# Altium PCB PCB1.PcbDoc (part 2 of 2)
Units mm, origin at the board's own origin, x right, y up, seen from the top; angles counter-clockwise.
Board outline 100 x 50 mm, 2 copper layers (Top Layer, Bottom Layer); 173 components, 108 nets, 510 pads, 764 vias.
Unrouted connection lines stored in the file: 12.
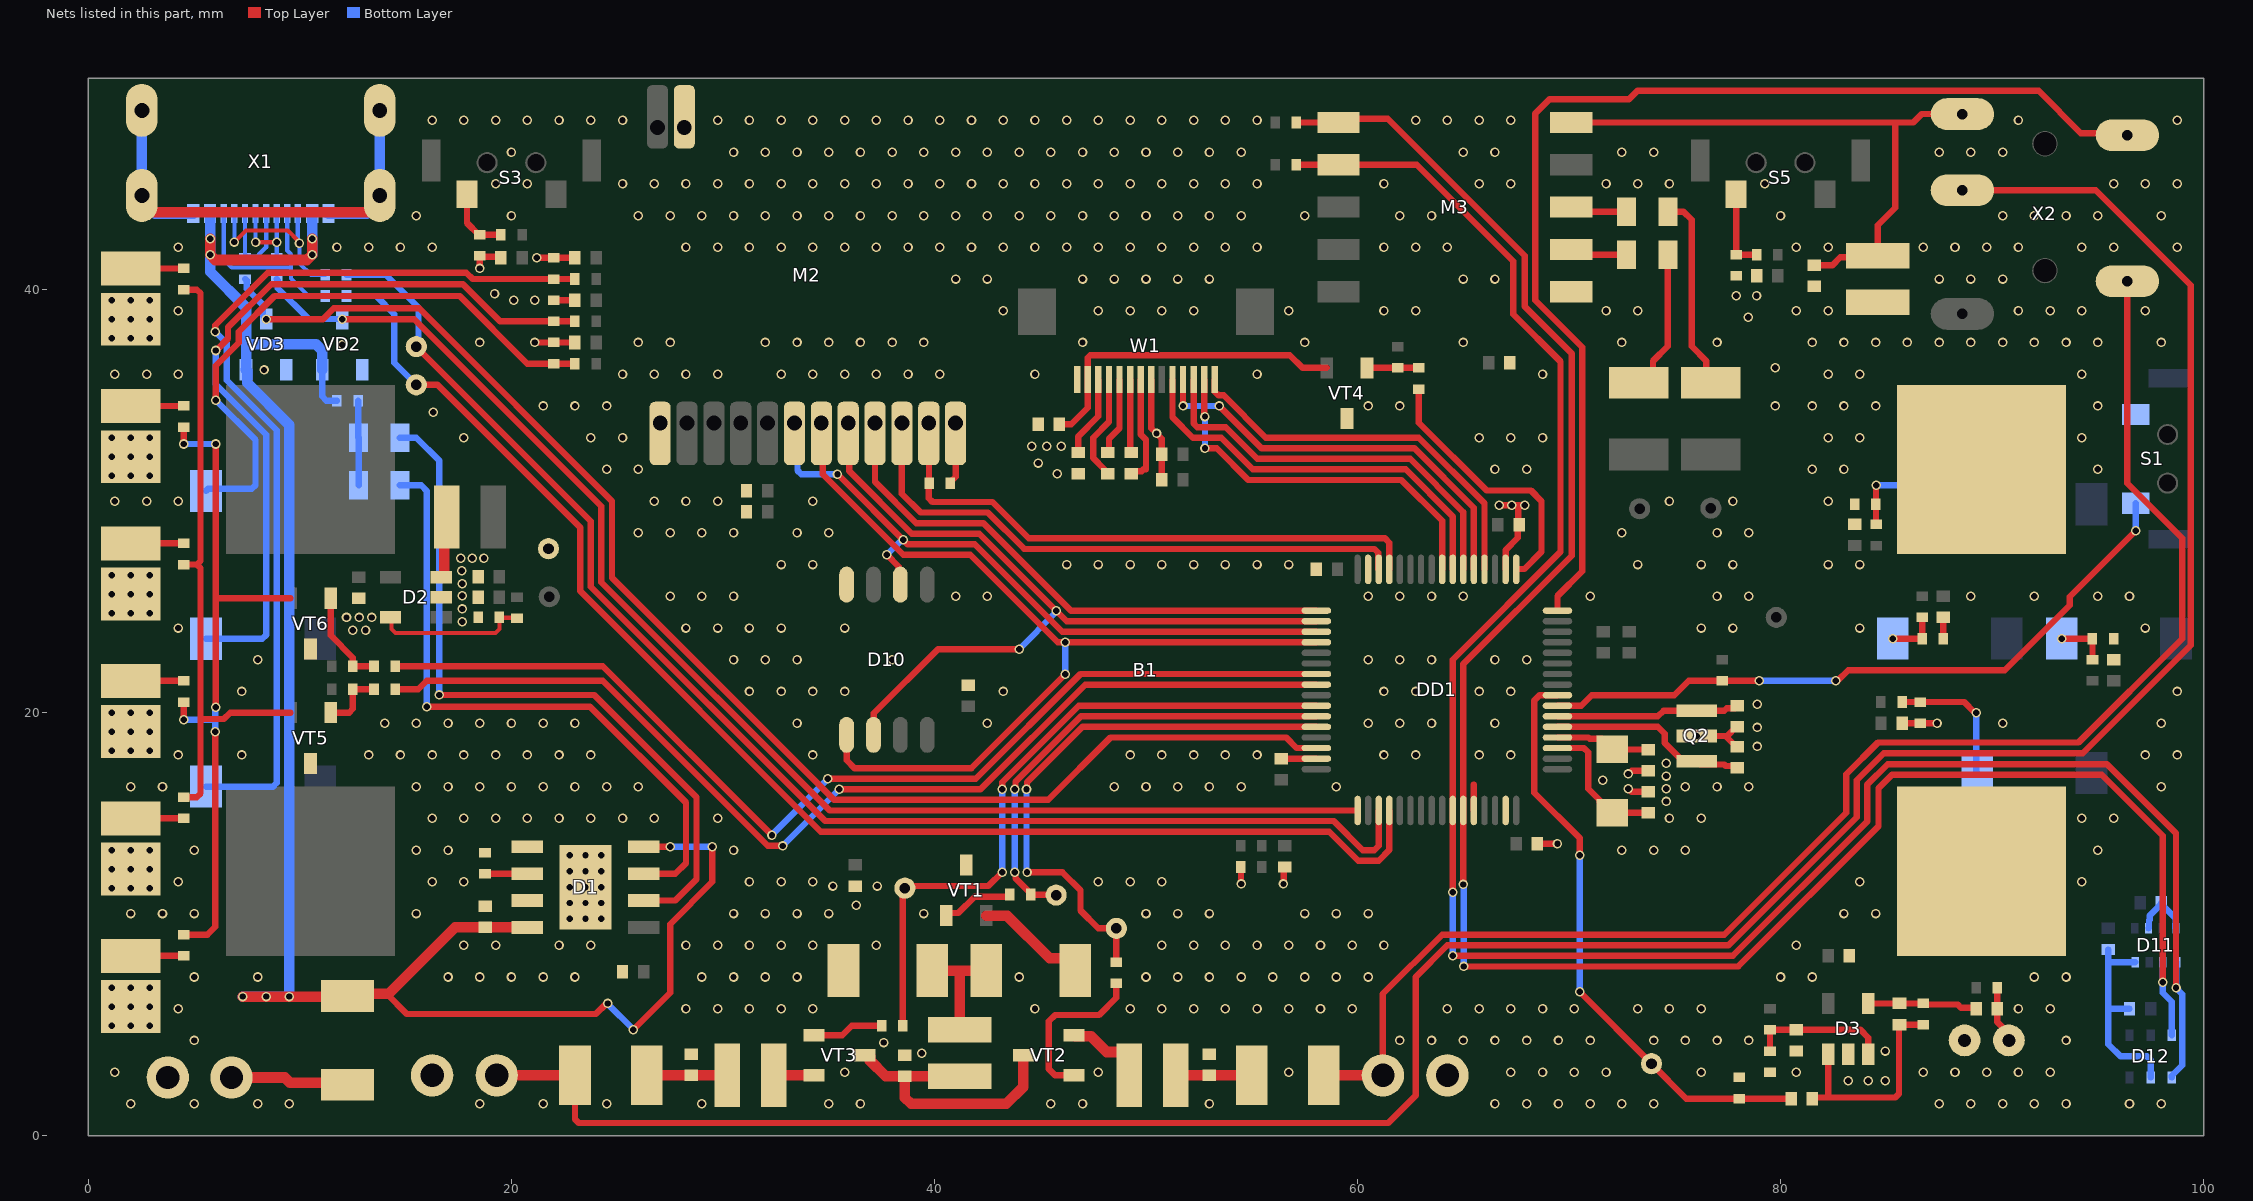
[diagram p2: the nets of this part, all layers, seen from the top]

## Via types
v1: diameter 0.45, hole 0.3, Top Layer to Bottom Layer, tented both sides, 764 vias

## Nets (pads, with @x,y where several pads share a name; then routed paths per layer and width w, separated by ;. In a path a pad name is that pad's centre, name@x,y a point inside that pad or via, vN(x,y) a via of type N, cw(c..) or ccw(c..) an arc to the next point about the centre after c; other vN are vias at no path point) (continued)
GND: B1.2 B1.4 C1.2 C2.2 C3.2 C4.2 C5.2 C6.2 C7.2 C8.2 C12.1 C13.2 C14.2 C16.2 C18.2 C19.2 C21.1 C22.2 C23.2 C24.2 C25.1 C26.2 C27.2 C28.2 C29.2 C30.2 C33.2 C34.2 C35.2 C36.2 C37.2 C38.2 C39.2 C40.2 C41.2 C42.2 C43.2 C44.1 C48.2 C49.2 C50.2 C51.2 C52.2 D1.1 D1.3 D1.9 D2.2 D3.2 D4.1 D5.1 D6.1 D7.1 D8.1 D9.1 D10.4 D11.1 D11.5 D11.7 D12.5 DD1.18 DD1.31 DD1.47 DD1.60 DD1.63 L7.2 M1.2 M2.1 M2.12 M2.14 M3.6 P2.1 P12.1 P13.1 P17.1 Q2.2 R15.2 R16.2 R18.2 R19.2 R22.2 R23.2 R26.2 R27.2 R29.2 R31.2 R33.2 R35.2 R37.2 R40.2 R42.2 S1.1 VD2.1 VD3.1 VD5.1 W1.LED_C W1.VSS X1.1 | length 70.5
  Top Layer w0.3: v1(18.5,41) R23.2@18.5,41.6 18.55,41.55 19.45,41.55 C36.2@19.5,41.5 ; v1(21.1,37.5) R37.2@22,37.5 C43.2@23,37.5 ; v1(21.2,41.5) R33.2@22,41.5 C41.2@23,41.5 ; R35.2@22,39.5 C42.2@23,39.5 ; R19.2@40.75,30.853 40.75,30.903 41,31.153 M2.1@41,33.7 ; W1.VSS@50.25,35.75 50.25,33.45 v1(50.5,33.2) 50.75,32.95 C18.2@50.75,32.226 C19.2@50.75,31 ; R16.2@54.49,12.679 54.49,11.91 v1(54.5,11.9) ; C6.2@56.388,17.824 DD1.47@58.054,17.824 ; v1(56.5,11.9) 56.51,11.91 56.51,12.641 C25.1@56.569,12.7 ; DD1.60@65.504,15.374 65.504,16.604 ; v1(66.7,29.8) v1(67.3,29.8) 67.606,29.8 ; DD1.18@67.004,26.774 67.004,27.686 67.58,28.262 67.58,28.828 C7.2@67.64,28.888 67.606,28.922 67.606,29.8 ; v1(67.9,29.8) 67.606,29.8 ; C8.2@68.504,13.8 v1(69.454,13.8) ; v1(72.8,16.4) 72.814,16.4 72.956,16.258 C2.2@73.742,16.258 ; v1(72.8,17.1) 72.814,17.1 72.964,17.25 C1.2@73.75,17.25 ; v1(76.041,18.895) 77.473,18.895 ; C3.2@77.953,18.386 77.903,18.386 77.473,18.815 77.473,18.895 ; C4.2@77.953,19.324 77.903,19.324 77.473,18.895 ; C40.2@85.75,19.5 R31.2@86.604,19.5 v1(87.4,19.5) ; R26.2@87.7,23.5 C37.2@87.7,24.5
  Top Layer w0.5: X1.1@2.525,44.45 2.525,44.221 3.087,43.659 13.213,43.659 13.775,44.221 X1.1@13.775,44.45 ; C23.2@18.75,10.845 C23.2@18.8,10.845
  Bottom Layer w0.3: C50.2@95.5,8.8 95.5,8.175 ; C52.2@96.5,6 95.5,6 ; D11.1@96.775,8.2 95.525,8.2 95.5,8.175 ; D11.7@97.4,9.8 97.425,9.825 97.425,10.176 97.458,10.209 97.458,10.408 C51.2@98,10.95 ; D12.5@97.5,2.75 97.5,3.574 97.324,3.75 96.075,3.75 95.5,4.325 95.5,6 ; C51.2@98,11 C51.2@98,10.95 ; D11.5@98.7,9.8 98.675,9.825 98.675,10.275 C51.2@98,10.95 ; 95.5,6 95.5,8.175
  Bottom Layer w0.5: X1.1@2.525,48.475 2.525,44.221 3.146,43.6 X1.1@4.95,43.6 ; X1.1@11.35,43.6 13.154,43.6 13.775,44.221 X1.1@13.775,44.335 ; X1.1@13.775,44.45 X1.1@13.775,48.475
  other v1: 2,1.5 5,1.5 8,1.5 9.5,1.5 18.5,1.5 21.5,1.5 24.5,1.5 29,1.5 35,1.5 36.5,1.5 45.5,1.5 47,1.5 53,1.5 66.5,1.5 68,1.5 69.5,1.5 71,1.5 72.5,1.5 74,1.5 87.5,1.5 89,1.5 90.5,1.5 92,1.5 93.5,1.5 96.5,1.5 98,1.5 83.2,2.6 84.15,2.6 84.95,2.6 1.25,3 35.75,3 47.75,3 56.75,3 67.25,3 68.75,3 70.25,3 71.75,3 76.25,3 80.75,3 86.75,3 88.25,3 89.75,3 91.25,3 92.75,3 39.4,3.9 84.95,4 37.6,4.4 5,4.5 62,4.5 63.5,4.5 65,4.5 66.5,4.5 68,4.5 69.5,4.5 71,4.5 74,4.5 75.5,4.5 77,4.5 78.5,4.5 93.5,4.5 1.1,5.2 2,5.2 2.9,5.2 4.25,6 28.25,6 29.75,6 31.25,6 32.75,6 34.25,6 44.75,6 49.25,6 50.75,6 52.25,6 53.75,6 55.25,6 56.75,6 58.25,6 59.75,6 64.25,6 65.75,6 67.25,6 68.75,6 70.25,6 73.25,6 74.75,6 76.25,6 91.25,6 92.75,6 1.1,6.1 2,6.1 2.9,6.1 1.1,7 2,7 2.9,7 5,7.5 8,7.5 17,7.5 18.5,7.5 20,7.5 21.5,7.5 23,7.5 29,7.5 30.5,7.5 32,7.5 33.5,7.5 44,7.5 50,7.5 51.5,7.5 53,7.5 54.5,7.5 56,7.5 57.5,7.5 59,7.5 60.5,7.5 80,7.5 81.5,7.5 92,7.5 93.5,7.5 17.75,9 19.25,9 22.25,9 23.75,9 28.25,9 29.75,9 31.25,9 32.75,9 34.25,9 37.25,9 50.75,9 52.25,9 53.75,9 55.25,9 56.75,9 58.25,9 59.75,9 61.25,9 80.75,9 2,10.5 3.5,10.5 5,10.5 15.5,10.5 30.5,10.5 32,10.5 33.5,10.5 35,10.5 39.5,10.5 50,10.5 51.5,10.5 53,10.5 57.5,10.5 59,10.5 60.5,10.5 83,10.5 84.5,10.5 36.3,10.9 1.1,11.7 2,11.7 2.9,11.7 35.2,11.8 37.3,11.8 4.25,12 16.25,12 17.75,12 31.25,12 32.75,12 34.25,12 47.75,12 49.25,12 50.75,12 83.75,12 94.25,12 1.1,12.6 2,12.6 2.9,12.6 1.1,13.5 2,13.5 2.9,13.5 5,13.5 15.5,13.5 17,13.5 30.5,13.5 72.5,13.5 74,13.5 75.5,13.5 95,13.5 16.25,15 17.75,15 19.25,15 20.75,15 22.25,15 23.75,15 25.25,15 26.75,15 29.75,15 74.75,15 76.25,15 94.25,15 95.75,15 74.6,15.8 74.6,16.4 2,16.5 3.5,16.5 15.5,16.5 17,16.5 18.5,16.5 20,16.5 21.5,16.5 23,16.5 24.5,16.5 26,16.5 48.5,16.5 50,16.5 51.5,16.5 53,16.5 54.5,16.5 59,16.5 75.5,16.5 77,16.5 78.5,16.5 98,16.5 71.6,16.8 74.6,17 74.6,17.6 4.25,18 7.25,18 13.25,18 14.75,18 16.25,18 17.75,18 19.25,18 20.75,18 22.25,18 23.75,18 34.25,18 49.25,18 50.75,18 52.25,18 53.75,18 55.25,18 61.25,18 62.75,18 65.75,18 67.25,18 97.25,18 98.75,18 1.1,18.2 2,18.2 2.9,18.2 78.9,18.4 1.1,19.1 2,19.1 2.9,19.1 78.9,19.3 14,19.5 15.5,19.5 17,19.5 18.5,19.5 20,19.5 21.5,19.5 23,19.5 33.5,19.5 42.5,19.5 60.5,19.5 62,19.5 63.5,19.5 66.5,19.5 90.5,19.5 98,19.5 1.1,20 2,20 2.9,20 78.9,20.4 7.25,21 31.25,21 32.75,21 34.25,21 35.75,21 43.25,21 61.25,21 62.75,21 65.75,21 67.25,21 98.75,21 8,22.5 30.5,22.5 32,22.5 33.5,22.5 38,22.5 60.5,22.5 62,22.5 63.5,22.5 66.5,22.5 68,22.5 12.5,23.9 13.1,23.9 4.25,24 28.25,24 29.75,24 31.25,24 32.75,24 35.75,24 76.25,24 77.75,24 83.75,24 97.25,24 17.675,24.3 12.2,24.5 12.8,24.5 13.4,24.5 1.1,24.7 2,24.7 2.9,24.7 17.675,24.9 27.5,25.5 29,25.5 30.5,25.5 41,25.5 42.5,25.5 60.5,25.5 62,25.5 63.5,25.5 65,25.5 71,25.5 77,25.5 78.5,25.5 89,25.5 92,25.5 95,25.5 96.5,25.5 17.675,25.525 1.1,25.6 2,25.6 2.9,25.6 17.675,26.1 1.1,26.5 2,26.5 2.9,26.5 17.65,26.7 32.75,27 34.25,27 46.25,27 47.75,27 49.25,27 50.75,27 52.25,27 53.75,27 55.25,27 56.75,27 73.25,27 76.25,27 77.75,27 82.25,27 83.75,27 17.6,27.3 18.15,27.3 18.7,27.3 26,28.5 27.5,28.5 29,28.5 30.5,28.5 33.5,28.5 35,28.5 72.5,28.5 77,28.5 78.5,28.5 1.25,30 2.75,30 4.25,30 26.75,30 28.25,30 29.75,30 34.25,30 74.75,30 77.75,30 82.25,30 1.1,31.2 2,31.2 2.9,31.2 45.8,31.3 24.5,31.5 26,31.5 66.5,31.5 68,31.5 81.5,31.5 83,31.5 95,31.5 44.9,31.8 1.1,32.1 2,32.1 2.9,32.1 44.6,32.6 45.3,32.6 46,32.6 1.1,33 2,33 2.9,33 17.75,33 23.75,33 25.25,33 65.75,33 67.25,33 68.75,33 82.25,33 83.75,33 94.25,33 16.3,34.2 21.5,34.5 23,34.5 24.5,34.5 60.5,34.5 62,34.5 79.75,34.5 81.5,34.5 83,34.5 84.5,34.5 95,34.5 1.25,36 2.75,36 4.25,36 25.25,36 26.75,36 28.25,36 29.75,36 32.75,36 34.25,36 35.75,36 37.25,36 38.75,36 40.25,36 44.75,36 55.25,36 68.75,36 82.25,36 83.75,36 94.25,36 8.3,36.2 79.75,36.3 12,37.4 18.5,37.5 26,37.5 27.5,37.5 32,37.5 33.5,37.5 35,37.5 36.5,37.5 38,37.5 39.5,37.5 47,37.5 57.5,37.5 65,37.5 72.5,37.5 77,37.5 81.5,37.5 83,37.5 84.5,37.5 86,37.5 87.5,37.5 89,37.5 90.5,37.5 92,37.5 93.5,37.5 95,37.5 98,37.5 1.1,37.7 2,37.7 2.9,37.7 1.1,38.6 2,38.6 2.9,38.6 78.468,38.7 4.25,39 43.25,39 47.75,39 49.25,39 50.75,39 52.25,39 56.75,39 61.25,39 62.75,39 71.75,39 73.25,39 80.75,39 82.25,39 91.25,39 92.75,39 94.25,39 97.25,39 1.1,39.5 2,39.5 2.9,39.5 20.1,39.5 21.1,39.5 77.9,39.706 78.868,39.706 19.2,39.8 41,40.5 42.5,40.5 47,40.5 48.5,40.5 50,40.5 51.5,40.5 53,40.5 65,40.5 66.5,40.5 87.5,40.5 89,40.5 90.5,40.5 4.25,42 11.75,42 13.25,42 14.75,42 16.25,42 28.25,42 29.75,42 31.25,42 32.75,42 34.25,42 35.75,42 37.25,42 38.75,42 40.25,42 41.75,42 43.25,42 44.75,42 46.25,42 47.75,42 49.25,42 50.75,42 52.25,42 53.75,42 55.25,42 61.25,42 62.75,42 64.25,42 80.75,42 82.25,42 86.75,42 88.25,42 89.75,42 91.25,42 94.25,42 95.75,42 98.75,42 15.5,43.5 20,43.5 26,43.5 27.5,43.5 29,43.5 30.5,43.5 32,43.5 33.5,43.5 35,43.5 36.5,43.5 38,43.5 39.5,43.5 41,43.5 42.5,43.5 44,43.5 45.5,43.5 47,43.5 48.5,43.5 50,43.5 51.5,43.5 53,43.5 54.5,43.5 57.5,43.5 62,43.5 63.5,43.5 80,43.5 90.5,43.5 92,43.5 93.5,43.5 95,43.5 98,43.5 19.25,45 20.75,45 25.25,45 26.75,45 28.25,45 29.75,45 31.25,45 32.75,45 34.25,45 35.75,45 37.25,45 38.75,45 40.25,45 41.75,45 43.25,45 44.75,45 46.25,45 47.75,45 49.25,45 50.75,45 52.25,45 53.75,45 55.25,45 61.25,45 65.75,45 67.25,45 71.75,45 73.25,45 74.75,45 79.25,45 95.75,45 97.25,45 98.75,45 20,46.5 30.5,46.5 32,46.5 33.5,46.5 35,46.5 36.5,46.5 38,46.5 39.5,46.5 41,46.5 42.5,46.5 44,46.5 45.5,46.5 47,46.5 48.5,46.5 50,46.5 51.5,46.5 53,46.5 54.5,46.5 65,46.5 66.5,46.5 72.5,46.5 74,46.5 87.5,46.5 89,46.5 90.5,46.5 16.25,48 17.75,48 19.25,48 20.75,48 22.25,48 23.75,48 25.25,48 29.75,48 31.25,48 32.75,48 34.25,48 35.75,48 37.25,48 38.75,48 40.25,48 41.75,48 43.25,48 44.75,48 46.25,48 47.75,48 49.25,48 50.75,48 52.25,48 53.75,48 55.25,48 62.75,48 64.25,48 65.75,48 67.25,48 91.25,48 98.75,48
HEADPHONE_PR: DD1.16 X2.2 | length 54.2
  Top Layer w0.3: DD1.16@69.454,24.824 69.454,25.512 70.624,26.682 70.624,37.276 68.4,39.5 68.4,48.324 69.076,49 72.836,49 73.236,49.4 92.201,49.4 94.201,47.4 96.3,47.4 X2.2@96.4,47.3
lcd_cd: DD1.22 W1.CD | length 19.3
  Top Layer w0.3: W1.CD@52.25,35.75 52.25,33.668 52.426,33.492 53.763,33.492 55.255,32 62.486,32 65.004,29.482 DD1.22@65.004,26.774
LCD_PWM: DD1.17 R12.1 | length 12.9
  Top Layer w0.3: R12.1@62.9,35.3 62.9,33.707 66.107,30.5 68.2,30.5 68.7,30 68.7,27.6 67.887,26.787 67.517,26.787 DD1.17@67.504,26.774
lcd_rst: DD1.24 W1.RST | length 18.2
  Top Layer w0.3: W1.RST@52.75,35.75 52.75,34.051 52.788,34.014 v1(52.788,34) ; v1(52.788,32.492) 53.349,32.492 54.841,31 62.072,31 64.004,29.068 DD1.24@64.004,26.774
  Bottom Layer w0.3: v1(52.788,32.492) v1(52.788,34)
LED_COLD: DD1.40 R45.1 | length 50.1
  Top Layer w0.3: R45.1@14.5,21.1 15.6,21.1 16,21.5 24.315,21.5 32.108,13.707 32.815,13.707 v1(32.825,13.697) ; v1(35.5,16.374) 42.174,16.374 47.124,21.324 DD1.40@58.054,21.324
  Bottom Layer w0.3: v1@32.825,13.698 v1(35.5,16.374)
LED_WARM: DD1.39 R50.1 | length 50
  Top Layer w0.3: R50.1@14.5,22.2 24.322,22.2 v1(32.316,14.207) ; v1(34.956,16.873) v1(34.956,16.873) 41.953,16.874 46.903,21.824 DD1.39@58.054,21.824
  Bottom Layer w0.3: v1(32.316,14.207) 32.316,14.219 34.956,16.86 v1(34.956,16.873)
MIC: C47.2 DD1.8 P6.1 R40.1 | length 28
  Top Layer w0.3: DD1.8@69.454,20.824 68.604,20.824 68.354,20.574 68.354,16.219 70.5,14.073 v1(70.5,13.25) ; v1(70.5,6.8) P6.1@73.9,3.4 75.55,1.75 R40.1@78.05,1.75 C47.2@80.5,1.75
  Bottom Layer w0.3: v1(70.5,6.8) v1(70.5,13.25)
NetC1_1: C1.1 DD1.4 Q1.1 | length 4.5
  Top Layer w0.3: DD1.4@69.454,18.824 70.004,18.824 70.916,18.824 70.982,18.758 71.55,18.758 Q1.1@72.05,18.258 73.742,18.258 C1.1@73.75,18.25
NetC2_1: C2.1 DD1.3 Q1.2 | length 6.6
  Top Layer w0.3: DD1.3@69.454,18.324 70.004,18.324 70.709,18.324 70.904,18.129 70.904,16.404 71.45,15.858 71.45,15.758 71.95,15.258 C2.1@73.742,15.258
NetC3_1: C3.1 DD1.5 Q2.1 | length 9.3
  Top Layer w0.3: DD1.5@69.454,19.324 74.2,19.324 74.524,19 74.524,18.562 75.391,17.695 Q2.1@76.041,17.695 ; Q2.1@76.191,17.545 77.341,17.545 77.413,17.473 77.866,17.473 C3.1@77.953,17.386
NetC4_1: C4.1 DD1.6 Q2.3 | length 8.7
  Top Layer w0.3: DD1.6@69.454,19.824 74.2,19.824 74.471,20.095 77.341,20.095 77.45,20.204 77.833,20.204 C4.1@77.953,20.324
NetC11_1: C11.1 C14.1 L2.2 | length 3.6
  Top Layer w0.5: L2.2@51.4,2.85 C14.1@53,2.85 C11.1@55,2.85
NetC13_1: C13.1 L1.2 VT2.2 VT3.2 | length 13.6
  Top Layer w0.5: 36.7,3.8 36.9,3.8 36.95,3.75 36.95,3.55 37.7,2.8 C13.1@38.6,2.8 ; L1.2@41.2,2.8 C13.1@38.6,2.8 ; 44.2,3.8 44.2,2.3 43.4,1.5 38.893,1.5 38.6,1.793 C13.1@38.6,2.8
NetC15_1: C15.1 C16.1 L3.2 | length 3.8
  Top Layer w0.5: C15.1@26.4,2.85 C16.1@28.5,2.85 L3.2@30.2,2.85
NetC17_1: C17.1 W1.VB1- | length 3.5
  Top Layer w0.3: W1.VB1-@49.25,35.75 49.25,32.35 C17.1@49.3,32.3
NetC17_2: C17.2 W1.VB1+ | length 5.1
  Top Layer w0.3: C17.2@49.3,31.3 49.42,31.42 49.799,31.42 49.879,31.5 49.999,31.5 49.999,32.901 49.75,33.15 W1.VB1+@49.75,35.75
NetC20_1: C20.1 W1.VB0+ | length 5.1
  Top Layer w0.3: C20.1@48.2,31.3 48.08,31.42 48.03,31.42 48.03,31.509 47.5,32.039 47.5,33 48.25,33.75 W1.VB0+@48.25,35.75
NetC20_2: C20.2 W1.VB0- | length 3.7
  Top Layer w0.3: C20.2@48.2,32.3 48.25,32.35 48.25,32.95 48.75,33.45 W1.VB0-@48.75,35.75
NetC21_2: C21.2 W1.VLCD | length 3.8
  Top Layer w0.3: C21.2@46.8,32.3 46.8,33.058 47.75,34.008 W1.VLCD@47.75,35.75
NetC22_1: C22.1 VT4.3 W1.LED_A | length 15.6
  Top Layer w0.3: C22.1@45.9,33.641 46.47,33.641 47.25,34.421 W1.LED_A@47.25,35.75 47.25,36.783 47.367,36.9 56.8,36.9 57.4,36.3 58.55,36.3
NetC31_1: C31.1 L5.2 | length 9.4
  Top Layer w0.3: L5.2@74.676,43.688 75.412,43.688 75.8,43.3 75.8,37.318 76.494,36.624 76.494,35.806 C31.1@76.7,35.6
NetC32_1: C32.1 L6.2 | length 6.7
  Top Layer w0.3: C32.1@73.3,35.6 73.371,35.6 73.971,36.2 73.971,36.624 74.676,37.329 L6.2@74.676,41.656
NetC33_1: C33.1 L7.1 M3.10 X2.1 | length 28.5
  Top Layer w0.3: M3.10@70.1,47.9 85.425,47.9 ; C33.1@81.6,41.156 82.456,41.156 82.826,41.526 84.526,41.526 L7.1@84.6,41.6 84.6,43.05 85.425,43.875 85.425,47.9 ; X2.1@88.6,48.3 86.672,48.3 86.272,47.9 85.425,47.9
NetC45_1: C45.1 C46.2 D3.4 R39.1 | length 5.2
  Top Layer w0.3: D3.4@84.15,6.25 C45.1@85.6,6.25 ; C45.1@85.625,6.25 C45.1@85.6,6.25 ; C46.2@89.25,6 89.2,6.05 88.53,6.05 88.38,6.2 86.8,6.2 R39.1@86.75,6.25 C45.1@85.6,6.25
NetC45_2: C45.2 C47.1 D3.1 R39.2 | length 10.7
  Top Layer w0.3: C47.1@81.5,1.75 81.55,1.8 82.25,1.8 ; D3.1@82.25,3.85 82.25,1.8 ; R39.2@86.75,5.25 85.6,5.25 85.6,1.976 85.424,1.8 82.25,1.8
NetC46_1: C46.1 M1.1 R38.2 | length 2.7
  Top Layer w0.3: R38.2@90.25,7 C46.1@90.25,6 90.25,5.375 90.8,4.825 M1.1@90.8,4.5
NetC48_1: C48.1 D3.3 R41.2 R42.1 | length 6.6
  Top Layer w0.3: R42.1@79.5,4 R41.2@79.5,5 C48.1@80.75,5 83.78,5 84.15,4.63 D3.3@84.15,3.85
NetD1_2: D1.2 R15.1 | length 2
  Top Layer w0.3: R15.1@18.75,12.385 D1.2@20.75,12.385
NetD1_6: D1.6 VD6.2 | length 34.4
  Top Layer w0.3: v1(16.58,20.835) 23.915,20.835 28.75,16 28.75,12.115 27.75,11.115 D1.6@26.25,11.115
  Bottom Layer w0.3: VD6.2@14.725,33 15.5,33 16.58,31.92 v1(16.58,20.835)
NetD1_7: D1.7 VD7.2 | length 30.8
  Top Layer w0.3: v1(16,20.285) 23.715,20.285 28.25,15.75 28.25,12.885 27.75,12.385 D1.7@26.25,12.385
  Bottom Layer w0.3: VD7.2@14.725,30.75 15.73,30.75 16,30.48 v1(16,20.285)
NetD2_3: D2.3 L4.1 | length 3
  Top Layer w0.5: D2.3@16.68,26.406 16.762,26.406 16.812,26.456 16.812,29.118 L4.1@16.944,29.25
NetD2_5: D2.5 R17.2 R18.1 | length 7.2
  Top Layer w0.2: D2.5@14.28,24.506 14.33,24.456 14.33,23.95 14.52,23.76 19.24,23.76 19.43,23.95 R18.1@19.43,24.506 19.455,24.481 20.239,24.481 R17.2@20.264,24.456
NetD4_2: D4.2 R43.2 | length 2.5
  Top Layer w0.3: D4.2@2,41 R43.2@4.5,41
NetD5_2: D5.2 R44.2 | length 2.5
  Top Layer w0.3: D5.2@2,28 R44.2@4.5,28
NetD6_2: D6.2 R46.2 | length 2.5
  Top Layer w0.3: D6.2@2,15 R46.2@4.5,15
NetD7_2: D7.2 R49.2 | length 2.5
  Top Layer w0.3: D7.2@2,21.5 R49.2@4.5,21.5
NetD8_2: D8.2 R51.2 | length 2.5
  Top Layer w0.3: D8.2@2,34.5 R51.2@4.5,34.5
NetD9_2: D9.2 R52.2 | length 2.5
  Top Layer w0.3: D9.2@2,8.5 R52.2@4.5,8.5
NetDD1_7: DD1.7 R1.2 S1.2 | length 32.3
  Top Layer w0.3: DD1.7@69.454,20.324 70.574,20.324 71.074,20.824 74.981,20.824 75.657,21.5 R1.2@77.25,21.5 v1(79,21.5) ; v1(82.614,21.5) 82.696,21.5 83.196,22 90.6,22 93.671,25.071 93.671,25.471 v1(96.8,28.6)
  Bottom Layer w0.3: v1(79,21.5) v1(82.614,21.5) ; v1(96.8,28.6) S1.2@96.8,29.9
NetL1_1: L1.1 VD4.2 VD5.2 | length 5.4
  Top Layer w0.5: VD5.2@39.9,7.8 41.275,7.8 ; L1.1@41.2,5 41.2,7.725 41.275,7.8 ; VD4.2@42.45,7.8 41.275,7.8
NetL2_1: L2.1 VT2.3 | length 3.8
  Top Layer w0.5: 46.6,4.75 46.65,4.7 47.4,4.7 48.145,3.955 48.85,3.955 49.2,3.605 L2.1@49.2,2.85
NetL3_1: L3.1 VT3.3 | length 1.9
  Top Layer w0.5: L3.1@32.4,2.85 34.3,2.85
NetL5_1: L5.1 M3.8 | length 2.7
  Top Layer w0.3: M3.8@70.1,43.9 70.312,43.688 L5.1@72.726,43.688
NetL6_1: L6.1 M3.7 | length 2.7
  Top Layer w0.3: M3.7@70.1,41.9 70.344,41.656 L6.1@72.726,41.656
NetP1_1: P1.1 VD1.1 | length 5.6
  Top Layer w0.5: P1.1@6.763,2.75 9.277,2.75 9.527,2.5 12.15,2.5 VD1.1@12.25,2.4
NetR4_1: R4.1 X1.5 X1.7 | length 4.5
  Top Layer w0.2: v1(7.9,42.241) v1(8.9,42.241)
  Bottom Layer w0.2: v1(7.9,42.241) X1.7@7.9,43.6 ; R4.1@8.9,41.5 v1(8.9,42.241) X1.5@8.9,43.6
NetR5_1: R5.1 X1.6 X1.8 | length 5
  Bottom Layer w0.2: R5.1@7.4,41.5 7.576,41.5 7.4,41.676 X1.8@7.4,43.6 ; R5.1@7.576,41.569 7.969,41.569 8.1,41.7 8.4,42 X1.6@8.4,43.6
NetR6_1: R6.1 X1.3 X1.9 | length 8.8
  Top Layer w0.2: v1(6.9,42.25) 7.45,42.8 9.425,42.8 9.666,42.559 9.666,42.549 9.975,42.241 v1(9.975,42.2)
  Bottom Layer w0.2: v1(6.9,42.25) 6.9,43.5 X1.9@6.9,43.6 ; X1.3@9.9,43.6 9.9,43.5 9.9,42.316 9.975,42.241 9.975,41.242 10.517,40.7 R6.1@11.2,40.7
NetR7_1: R7.1 X1.4 X1.10 | length 10.6
  Bottom Layer w0.2: X1.10@6.4,43.6 6.4,41.425 6.775,41.05 9.575,41.05 ; X1.4@9.4,43.6 9.4,41.85 9.575,41.675 9.575,41.05 ; R7.1@11.2,39.7 10.4,39.7 9.575,40.525 9.575,41.05
NetR8_2: R8.2 VT1.1 | length 3.4
  Top Layer w0.3: VT1.1@40.55,10.4 40.674,10.524 41.124,10.524 41.9,11.3 43.475,11.3 43.55,11.375 R8.2@43.55,11.4
NetR9_2: R9.2 VT2.1 | length 7.9
  Top Layer w0.3: VT2.1@46.6,2.85 45.7,2.85 45.4,3.15 45.4,5.4 45.7,5.7 47.775,5.7 48.6,6.525 R9.2@48.6,7.2
NetR10_2: R10.2 VT3.1 | length 3.4
  Top Layer w0.3: VT3.1@34.3,4.75 35.637,4.75 36.087,5.2 R10.2@37.5,5.2
NetR11_1: R11.1 R12.2 VT4.1 | length 2.5
  Top Layer w0.3: VT4.1@60.45,36.3 R12.2@62.9,36.3
NetR13_2: R13.2 VD6.1 VD7.1 | length 4
  Bottom Layer w0.3: R13.2@12.75,34.75 12.75,33.025 VD6.1@12.775,33 VD7.1@12.775,30.75
NetR20_1: R20.1 R22.1 S2.2 | length 2.4
  Top Layer w0.3: v1(93.3,23.5) R22.1@94.75,23.5 R20.1@94.75,22.5
NetR21_1: R21.1 R23.1 S3.2 | length 3.2
  Top Layer w0.3: S3.2@17.9,44.5 17.9,43.15 18.45,42.6 R21.1@19.5,42.6
NetR24_1: R24.1 R26.1 S4.2 | length 2.4
  Top Layer w0.3: v1(85.3,23.5) R26.1@86.7,23.5 R24.1@86.7,24.5
NetR25_1: R25.1 R27.1 S5.2 | length 3.8
  Top Layer w0.3: S5.2@77.9,44.5 R27.1@77.9,41.656 R25.1@78.868,41.656
NetR28_1: R28.1 R29.1 S6.2 | length 7
  Top Layer w0.3: R28.1@84.53,28.9 84.515,28.915 84.515,29.839 R29.1@84.5,29.854 84.515,29.869 84.515,30.735 v1(84.53,30.75)
  Bottom Layer w0.3: v1(84.53,30.75) 86.235,30.75 87.131,29.854 S6.2@89.3,29.854
NetR30_1: R30.1 R31.1 S7.2 | length 6.7
  Top Layer w0.3: R30.1@85.75,20.5 86.654,20.5 R31.1@86.604,20.5 88.689,20.5 89.189,20 v1(89.25,20)
  Bottom Layer w0.3: v1(89.25,20) 89.25,17.196 S7.2@89.3,17.146
NetR32_1: R32.1 R33.1 S8.2 | length 44.4
  Top Layer w0.3: v1(6,38) 6,38.321 8.479,40.8 17.864,40.8 18.164,40.5 R33.1@22,40.5 R32.1@23,40.5
  Bottom Layer w0.3: S8.2@5.555,16.51 5.565,16.5 8.724,16.5 8.9,16.676 8.9,33.35 6.531,35.719 6.531,37.469 v1(6,38)
NetR34_1: R34.1 R35.1 S9.2 | length 36.7
  Top Layer w0.3: v1(6.021,37.121) 6.035,37.121 6.6,37.686 6.6,38.214 8.636,40.25 17.707,40.25 19.457,38.5 R35.1@22,38.5 ; R35.1@21.95,38.5 R34.1@23,38.5
  Bottom Layer w0.3: S9.2@5.555,23.495 8.224,23.495 8.4,23.671 8.4,33.143 6.021,35.521 v1(6.021,37.121)
NetR36_1: R36.1 R37.1 S10.2 | length 28.9
  Top Layer w0.3: v1(6.021,34.771) 6.021,36.401 7.1,37.479 7.1,38.007 8.793,39.7 17.55,39.7 20.75,36.5 R37.1@22,36.5 R36.1@23,36.5
  Bottom Layer w0.3: S10.2@5.555,30.48 5.654,30.579 7.724,30.579 7.9,30.755 7.9,32.893 v1(6.021,34.771)
NetR43_1: R43.1 R44.1 R46.1 VT5.3 | length 30.6
  Top Layer w0.3: R46.1@4.5,16 5.124,16 5.3,16.176 5.3,19.6 ; R44.1@4.5,27 5.124,27 ; R43.1@4.5,40 5.124,40 5.3,39.824 5.3,27.176 5.124,27 ; 9.55,20 6.7,20 6.4,19.7 5.4,19.7 5.3,19.6 ; 5.124,27 5.3,26.824 5.3,19.6
NetR45_2: R45.2 R47.1 VT5.1 | length 3
  Top Layer w0.3: VT5.1@11.45,20 12.324,20 12.5,20.176 12.5,20.96 R47.1@12.5,21.1 R45.2@13.5,21.1
NetR48_2: R48.2 R50.2 VT6.1 | length 4.6
  Top Layer w0.3: VT6.1@11.45,25.406 11.45,23.65 12.5,22.6 R48.2@12.5,22.2 R50.2@13.5,22.2
NetR49_1: R49.1 R51.1 R52.1 VT6.3 | length 32.7
  Top Layer w0.3: R52.1@4.5,9.5 5.624,9.5 6,9.876 v1(6,19.1) ; v1(4.5,19.657) R49.1@4.5,20.5 ; v1(4.5,32.7) R51.1@4.5,33.5 ; v1(6.021,20.25) 6.021,25.406 ; v1(6.021,32.7) 6.021,25.406 ; 9.55,25.406 6.021,25.406
  Bottom Layer w0.3: v1(4.5,19.657) 6,19.657 ; v1(4.5,32.7) v1(6.021,32.7) ; v1(6,19.1) 6,19.657 ; v1(6.021,20.25) 6,20.229 6,19.657
NetVD4_1: VD4.1 VT1.3 | length 5.3
  Top Layer w0.5: 42.45,10.4 43.43,10.4 45.443,8.387 46.15,8.387 46.65,7.887 VD4.1@46.65,7.8
OUT_L: C11.2 P11.1 X2.4 | length 70.4
  Top Layer w0.3: P11.1@61.2,2.85 61.2,6.7 64,9.5 64.043,9.5 77.336,9.5 83.1,15.264 83.1,17.079 84.607,18.586 86.836,18.586 94.086,18.586 99,23.5 99,28.25 96.4,30.85 X2.4@96.4,40.4
  Top Layer w0.5: C11.2@58.4,2.85 P11.1@61.2,2.85
OUT_R: C15.2 P14.1 X2.3 | length 125.6
  Top Layer w0.3: C15.2@23,2.85 23,0.776 23.176,0.6 61.45,0.6 62.75,1.9 62.75,7.5 64.25,9 77.543,9 83.6,15.057 83.6,16.807 84.879,18.086 86.836,18.086 94.293,18.086 99.4,23.193 99.4,40.201 94.901,44.7 X2.3@88.6,44.7
  Top Layer w0.5: P14.1@19.304,2.85 C15.2@23,2.85
PWM_SPEAKER_L: DD1.44 P7.1 R9.1 | length 26.5
  Top Layer w0.3: v1(44.35,16.372) 44.376,16.398 44.376,16.7 47,19.324 DD1.44@58.054,19.324 ; v1(44.376,12.447) 44.38,12.451 46.049,12.451 46.905,11.595 46.905,10.644 47.75,9.8 P7.1@48.6,9.8 R9.1@48.6,8.2
  Bottom Layer w0.3: v1(44.35,16.372) 44.35,12.474 v1(44.376,12.447)
PWM_SPEAKER_R: DD1.42 P9.1 R10.1 | length 32.1
  Top Layer w0.3: R10.1@38.5,5.2 38.5,11.6 38.7,11.8 42.55,11.8 v1(43.2,12.45) ; v1(43.2,16.375) 43.21,16.385 43.21,16.716 46.818,20.324 DD1.42@58.054,20.324
  Bottom Layer w0.3: v1(43.2,12.45) v1(43.2,16.375)
PWM_SPEAKER_VOL: DD1.43 P5.1 R8.1 | length 22.4
  Top Layer w0.3: v1(43.8,12.447) 43.829,12.418 43.829,12.171 44.562,11.438 44.562,11.388 45.737,11.388 P5.1@45.75,11.375 ; v1(43.8,16.385) 43.829,16.413 43.829,16.729 46.924,19.824 55.469,19.824 DD1.43@58.054,19.824
  Bottom Layer w0.3: v1(43.8,12.447) v1(43.8,16.385)
SCL: D11.4 D12.4 DD1.58 M3.2 R2.2 | length 101.4
  Top Layer w0.3: R2.2@57.1,45.9 M3.2@59.1,45.9 62.8,45.9 67.362,41.338 67.362,38.838 69.6,36.6 69.6,27.6 64.504,22.504 DD1.58@64.504,15.374 64.504,14.847 v1(64.504,11.5) ; v1(64.504,8.5) 64.816,8.5 65.23,8.5 77.75,8.5 84.1,14.85 84.1,16.6 85.064,17.564 95.436,17.564 98.7,14.3 v1(98.7,7)
  Bottom Layer w0.3: v1(64.504,8.5) v1(64.504,11.5) ; D12.4@98.5,2.75 98.5,2.825 99,3.325 99,6.686 98.7,6.986 v1(98.7,7) 98.71,7.01 98.71,8.185 D11.4@98.725,8.2
SDA: D11.3 D12.3 DD1.59 M3.1 R3.2 | length 99.8
  Top Layer w0.3: R3.2@57.1,47.9 M3.1@59.1,47.9 59.277,48.077 61.423,48.077 67.9,41.6 67.9,39.2 70.123,36.977 70.123,27.415 65.004,22.297 65.004,11.879 v1(65,11.875) ; v1(65.023,8) 78,8 84.63,14.63 84.63,16.423 85.271,17.064 95.186,17.064 98.075,14.175 v1(98.075,7.25)
  Bottom Layer w0.3: v1(65,11.875) 65,11.861 65.023,11.838 v1(65.023,8) ; D11.3@98.075,8.2 v1(98.075,7.25) 98.075,6.75 98.5,6.325 D12.3@98.5,4.75
SI_IRQ: DD1.30 M2.3 | length 27.8
  Top Layer w0.3: M2.3@38.46,33.7 38.46,30.348 39.347,29.461 42.524,29.461 44.247,27.739 60.798,27.739 60.985,27.553 60.985,26.793 DD1.30@61.004,26.774
SI_SDN: DD1.29 M2.2 R19.1 | length 27.5
  Top Layer w0.3: M2.2@39.73,33.7 39.74,33.69 39.74,30.863 R19.1@39.75,30.853 39.73,30.833 39.73,30.137 39.906,29.961 42.732,29.961 44.454,28.239 61.297,28.239 61.504,28.032 DD1.29@61.504,26.774
SPI1_CS: DD1.20 W1.CS | length 18.6
  Top Layer w0.3: W1.CS@53.25,35.75 53.25,35.176 53.426,35 53.669,35 55.669,33 62.9,33 66.004,29.896 DD1.20@66.004,26.774
SPI1_MOSI: DD1.23 W1.SDA | length 19.5
  Top Layer w0.3: W1.SDA@51.25,35.75 51.25,34.327 51.25,33.961 52.219,32.992 53.556,32.992 55.048,31.5 62.279,31.5 64.504,29.275 DD1.23@64.504,26.774
SPI1_SCK: DD1.21 W1.SCK | length 19.9
  Top Layer w0.3: v1(51.75,34.5) W1.SCK@51.75,35.75 ; v1(53.462,34.5) 55.462,32.5 62.693,32.5 65.504,29.689 DD1.21@65.504,26.774
  Bottom Layer w0.3: v1(51.75,34.5) v1(53.462,34.5)
SPI2_CS: DD1.33 M2.4 | length 26.2
  Top Layer w0.3: M2.4@37.19,33.7 37.19,30.911 39.139,28.961 42.317,28.961 46.455,24.824 DD1.33@58.054,24.824
SPI2_MISO: D10.2 DD1.35 M2.7 | length 32.7
  Top Layer w0.3: v1@35.421,31.265 38.725,27.961 41.903,27.961 46.041,23.824 DD1.35@58.054,23.824 ; v1@37.76,27.452 38.308,26.903 38.308,26.127 D10.2@38.385,26.05
  Bottom Layer w0.3: M2.7@33.38,33.7 33.52,33.559 33.52,31.451 33.696,31.275 v1(35.412,31.275) ; v1(37.75,27.461) 38.448,28.159 38.509,28.159 v1(38.518,28.168)
SPI2_MOSI: D10.5 DD1.36 M2.6 | length 44.3
  Top Layer w0.3: M2.6@34.65,33.7 34.924,33.426 34.69,33.193 34.716,33.167 34.716,31.264 38.518,27.461 41.696,27.461 45.833,23.324 DD1.36@58.054,23.324 ; D10.5@35.845,18.95 35.845,17.75 36.221,17.374 41.746,17.374 v1(46.186,21.814)
  Bottom Layer w0.3: v1(46.186,21.814) v1(46.186,23.324)
SPI2_SCK: D10.6 DD1.34 M2.5 | length 39
  Top Layer w0.3: M2.5@35.92,33.7 35.968,33.652 35.968,31.426 38.932,28.461 42.11,28.461 46.248,24.324 DD1.34@58.054,24.324 ; D10.6@37.115,18.95 37.131,18.966 37.131,19.966 40.165,23 v1(44,23)
  Bottom Layer w0.3: v1(44,23) 45.74,24.74 45.74,24.814 v1(45.75,24.824)
SW_CLK: DD1.49 R4.2 VD2.3 | length 63.8
  Top Layer w0.3: v1(12,38.6) 15.4,38.6 24.25,29.75 24.25,26.164 35.04,15.374 DD1.49@60.004,15.374
  Bottom Layer w0.3: R4.2@8.9,40.5 8.954,40.446 8.954,40.071 10.412,38.613 VD2.3@12,38.613 v1(12,38.6)
SW_DIO: DD1.46 R5.2 VD3.3 | length 65.4
  Top Layer w0.3: v1(8.4,38.6) 8.423,38.6 11.085,38.6 11.604,39.118 15.632,39.118 24.75,30 24.75,26.371 35.247,15.874 35.293,15.874 42.368,15.874 43.029,15.874 45.374,15.874 48.324,18.824 56.628,18.824 57.128,18.324 DD1.46@58.054,18.324
  Bottom Layer w0.3: R5.2@7.418,40.5 7.479,40.44 7.479,40.042 8.25,39.271 8.25,38.75 v1(8.4,38.6)
UART_DBG_RX: DD1.52 P4.1 R7.2 | length 65.5
  Top Layer w0.3: P4.1@15.5,35.5 16.5,35.5 23.25,28.75 23.25,25.75 34.626,14.374 58.669,14.374 60.043,13 61,13 61.504,13.504 DD1.52@61.504,15.374
  Bottom Layer w0.3: R7.2@12.2,39.7 13.6,39.7 14.464,38.836 14.464,36.536 P4.1@15.5,35.5
UART_DBG_TX: DD1.51 P3.1 R6.2 | length 64.9
  Top Layer w0.3: P3.1@15.5,37.305 23.75,29.056 23.75,25.957 34.833,14.874 58.876,14.874 60.25,13.5 60.793,13.5 61.004,13.711 DD1.51@61.004,15.374
  Bottom Layer w0.3: R6.2@12.2,40.7 14.05,40.7 15.607,39.143 15.607,37.413 P3.1@15.5,37.305
VSYS: C23.1 D1.4 D1.8 R13.1 VD1.2 VD2.2 VD3.2 X1.2 | length 97
  Top Layer w0.3: 14.007,6.793 14.1,6.7 15.05,5.75 23.989,5.75 24.489,6.25 v1(24.55,6.25) ; v1(25.75,5) 27.5,6.75 27.5,10 29.5,12 v1(29.5,13.655) ; D1.8@26.25,13.655 v1(27.5,13.655)
  Top Layer w0.5: v1(5.75,42.4) v1(5.75,41.65) 6,41.4 10.325,41.4 v1(10.575,41.65) v1(10.575,42.4) ; v1(7.3,6.575) v1(9.5,6.575) 12.225,6.575 12.35,6.7 14.1,6.7 14.2,6.7 17.345,9.845 C23.1@18.75,9.845 D1.4@20.75,9.845
  Bottom Layer w0.3: VD2.2@11.05,36.213 11.05,34.95 11.25,34.75 R13.1@11.75,34.75 ; v1(24.55,6.25) 24.55,6.225 25.75,5.025 v1(25.75,5) ; v1(27.5,13.655) v1(29.5,13.655)
  Bottom Layer w0.5: X1.2@5.75,43.6 5.75,43.5 v1(5.75,42.4) v1(5.75,41.65) 5.75,40.852 7.45,39.152 7.45,37.414 7.45,37.121 ; v1(7.3,6.575) v1(8.4,6.575) v1(9.5,6.575) 9.5,33.599 7.5,35.599 7.5,36.161 VD3.2@7.448,36.213 ; VD3.2@7.45,36.214 7.45,37.071 ; 7.5,37.414 10.757,37.414 11.05,37.121 VD2.2@11.05,36.213 ; v1(10.575,41.65) X1.2@10.575,43.6
pads on no net: D12.1 D12.6 DD1.2 DD1.11 DD1.14 DD1.15 DD1.45 DD1.53 DD1.54 M2.9 M2.10 M2.11 M2.13 M3.3 M3.4 M3.9 S1.0 S1.h S3.0 S3.h S5.0 S5.h W1.gnd X2.5 X2.h

## Polygon pours and split planes (outlines as drawn)
GND on Top Layer "GND" (solid, remove dead copper, pour order 2): 0,0 0,50 100,50 100,0
GND on Bottom Layer "GND" (solid, remove dead copper, pour order 0): 0,0 0,50 100,50 100,0

## Keep-outs
Keep-Out Layer:
  the board outline again, w0.1